# EAGLE board Schaltplan_VoltageLevelShifter_version2 (EAGLE 6.4)
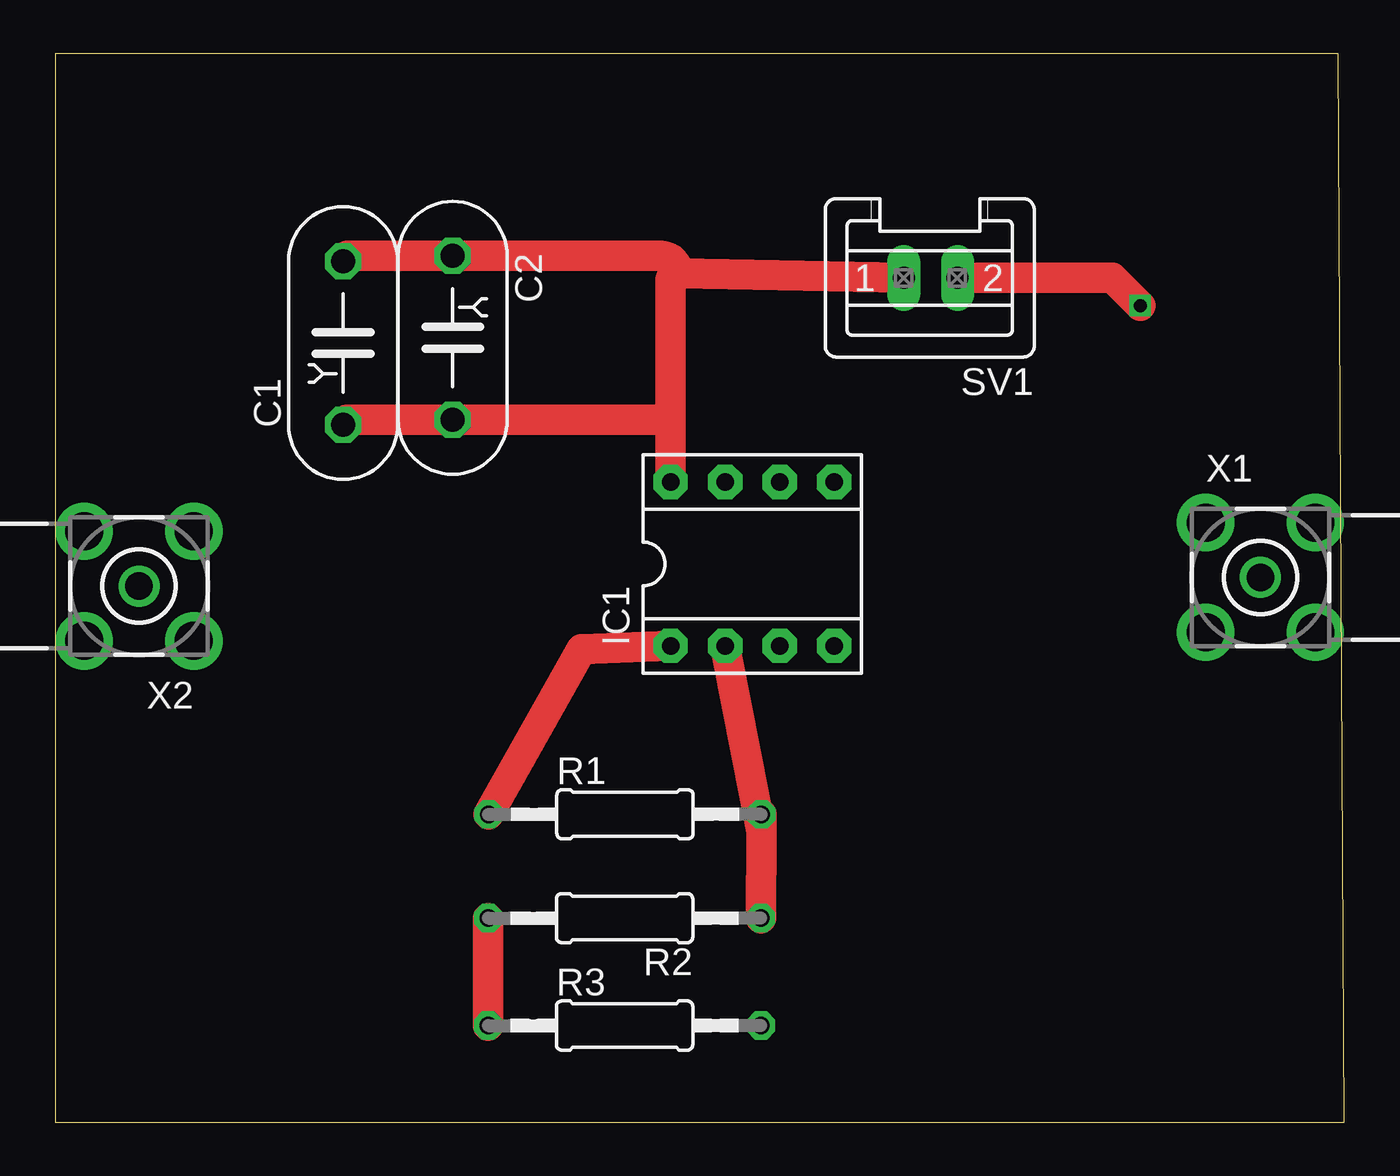
[diagram p0: board, top side]
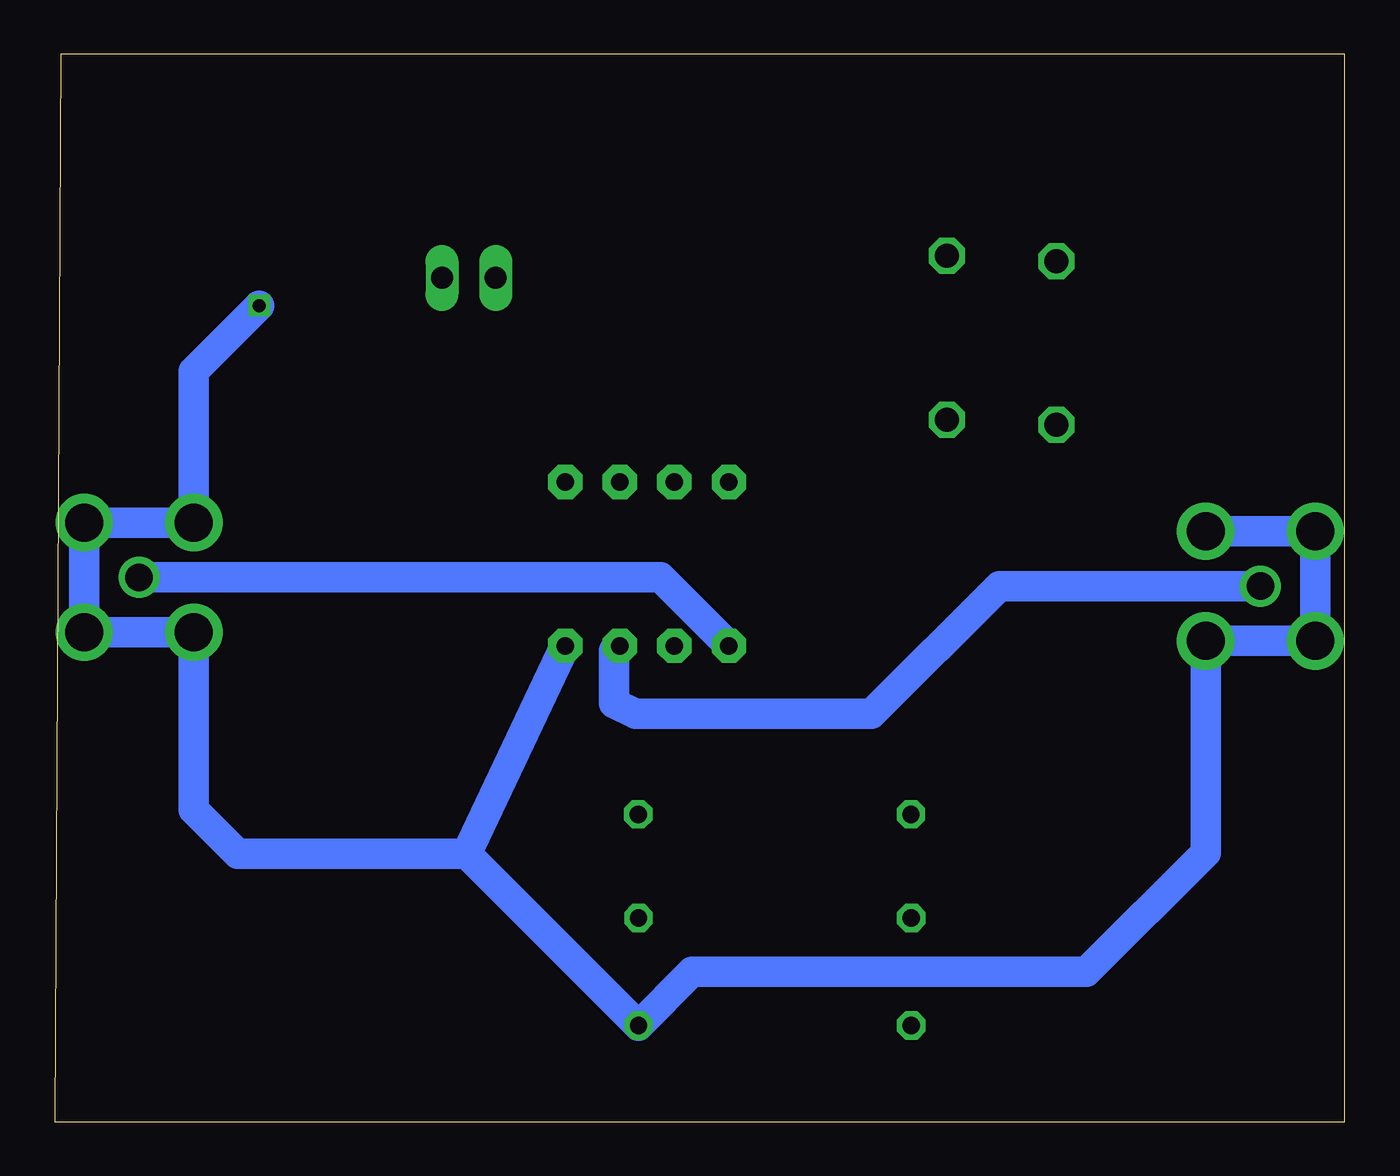
[diagram p1: board, bottom side, seen from below]

Size 60 x 49.72 mm. Coordinates in mm from the lower left corner, seen from the top.
Outline: 0,0 60,0 59.73,49.72 0,49.72 0,0
Copper layers (1*16): Top 0.035mm / dielectric 1.5mm / Bottom 0.035mm
Design rules "default": minimum track width 10mil, minimum drill 24mil, track to track 8mil, track to pad 8mil, pad to pad 8mil, via to via 8mil, smd to smd 8mil, copper to edge 40mil, drill to drill 8mil, minimum pad ring 10mil, minimum via ring 8mil, stop-mask expansion 4mil, vias tented up to drill 0mil, thermal gap 10mil

## Footprints (pad centres in the part's own frame; a part is rotated, then mirrored left to right if it is on the bottom)
YC7B5 = drill 1.118 octagon: 1 -3.81,0; 2 3.81,0
DIL08 = drill 0.813 pad 1.6 octagon: 1 -3.81,-3.81; 2 -1.27,-3.81; 3 1.27,-3.81; 4 3.81,-3.81; 5 3.81,3.81; 6 1.27,3.81; 7 -1.27,3.81; 8 -3.81,3.81
0207/12 = drill 0.813 octagon: 1 -6.35,0; 2 6.35,0
S02P = drill 1.016 long: 1 1.25,0; 2 -1.25,0
BU-SMA-H = drill 1.27: 1 0,0 | drill 1.778: 2 -2.55,2.55; 3 2.55,2.55; 4 2.55,-2.55; 5 -2.55,-2.55

## Placement (x,y rotation side)
C1  [YC7B5]  13.4,36.26 90 top
C2  [YC7B5]  18.5,36.5 270 top
IC1  OPA2650P  [DIL08]  32.45,25.98 0 top
R1  [0207/12]  26.52,14.33 0 top
R2  [0207/12]  26.5,9.5 180 top
R3  [0207/12]  26.5,4.5 0 top
SV1  [S02P]  40.75,39.29 180 top
X1  BU-SMA-H  [BU-SMA-H]  56.1,25.35 0 top
X2  BU-SMA-H  [BU-SMA-H]  3.9,24.95 180 top

## Library data of the parts
C1 C2 R1-R3 = rcl
IC1 = burr-brown; MPN: AD8056ANZ; OC_FARNELL: 1079308; OC_NEWARK: 19M0925
SV1 = con-amp-mt; OC_FARNELL: unknown; OC_NEWARK: unknown
X1 X2 = con-coax; OC_FARNELL: unknown; OC_NEWARK: unknown

## Nets
GND: IC1.4 R3.2 SV1.2 X1.2 X1.3 X1.4 X1.5 X2.2 X2.3 X2.4 X2.5
N$1: IC1.2 R1.2 R2.1
N$2: R2.2 R3.1
N$3: IC1.1 R1.1 X1.1
N$6: IC1.3 X2.1
VCC: C1.1 C1.2 C2.1 C2.2 IC1.8 SV1.1

## Tracks (layer width: path | path; a pad name or v marks a point on that pad's centre or on a via)
GND  (via drill 0.6)
  Top 1.422: SV1.2 49.21,39.29 v50.5,38
  Bottom 1.422: X2.5 X2.4 X2.3 X2.2 6.45,12.55 12,7 30.35,7 R3.2 40.85,12.5 | 40.85,12.5 51.5,12.5 53.55,14.55 X1.5 X1.4 X1.3 X1.2 53.55,34.95 v50.5,38 | IC1.4 40.85,12.5
N$1
  Top 1.422: R2.1 32.87,13.5 | 32.87,13.5 R1.2 | IC1.2 32.87,13.5
N$2
  Top 1.422: R3.1 R2.2
N$3
  Top 1.422: IC1.1 24.5,22 R1.1
  Bottom 1.422: X1.1 31.82,25.35 IC1.1
N$6
  Bottom 1.422: X2.1 16.05,24.95 22,19 33,19 34,19.5 34,21.95 IC1.3
VCC
  Top 1.422: SV1.1 29,39.5 | 29,39.5 arc90 28.64,39.14 28.64,33 | 28.64,33 IC1.8 | C1.2 arc-90 13.64,40.31 C2.1 28.19,40.31 arc-90 29,39.5 | C1.1 arc-90 13.64,32.69 C2.2 28.33,32.69 arc90 28.64,33